# Altium PCB AeroBoard.PcbDoc
Units mil, origin at the board's own origin, x right, y up, seen from the top; angles counter-clockwise.
Board outline 6000 x 4000 mil, 2 copper layers (Top Layer, Bottom Layer); 14 components, 10 nets, 45 pads, 0 vias.
Unrouted connection lines stored in the file: 25.
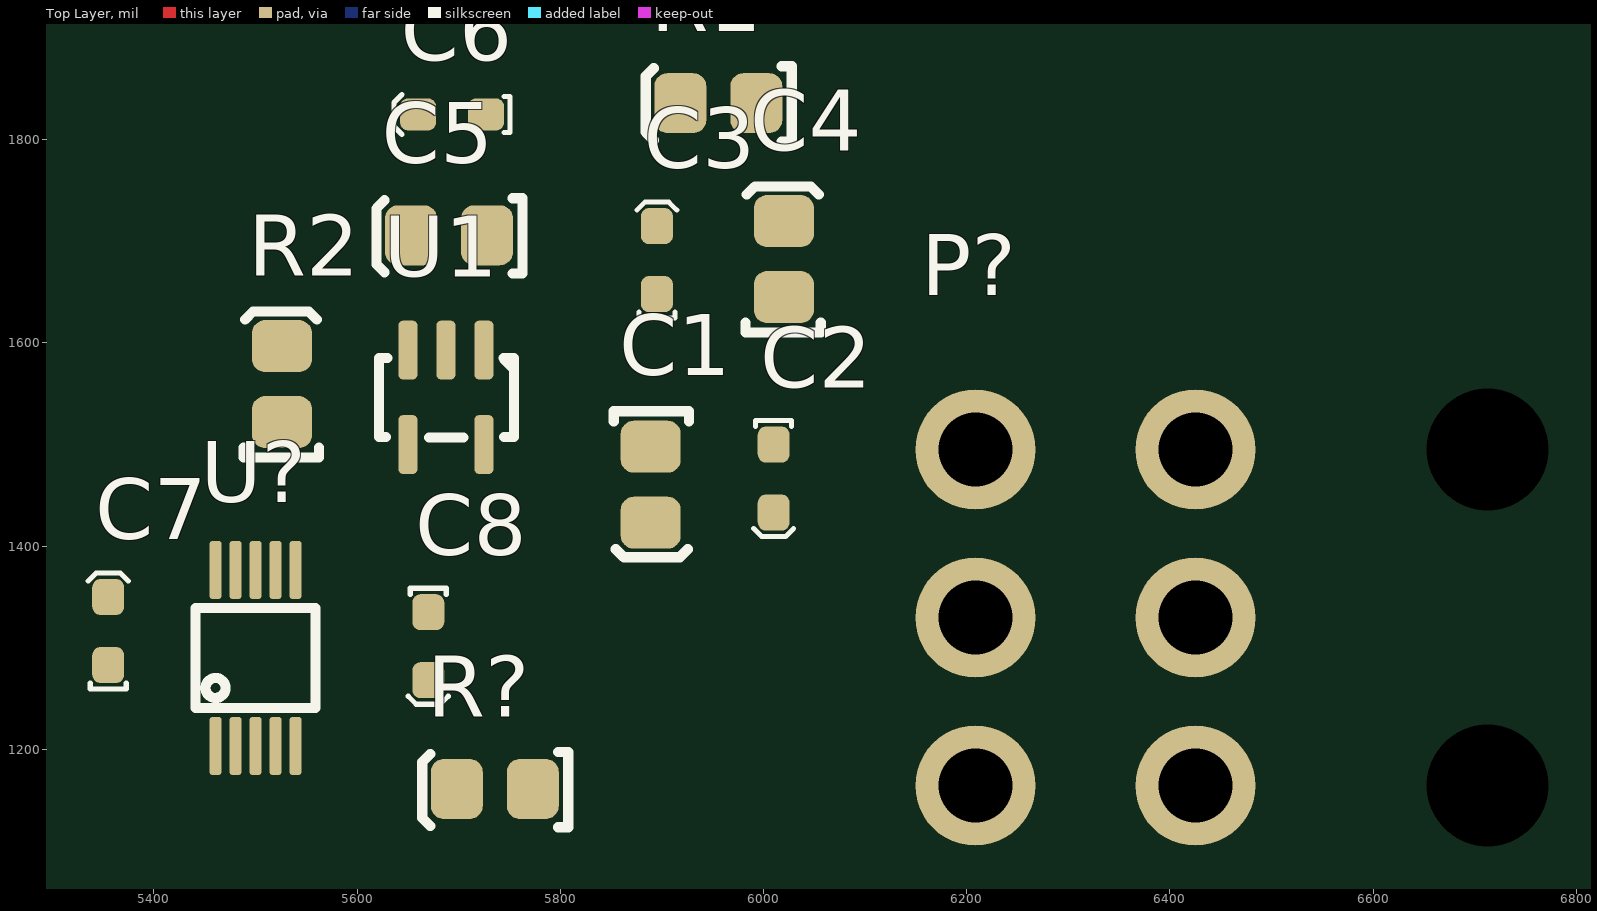
[diagram p0: Top Layer view]
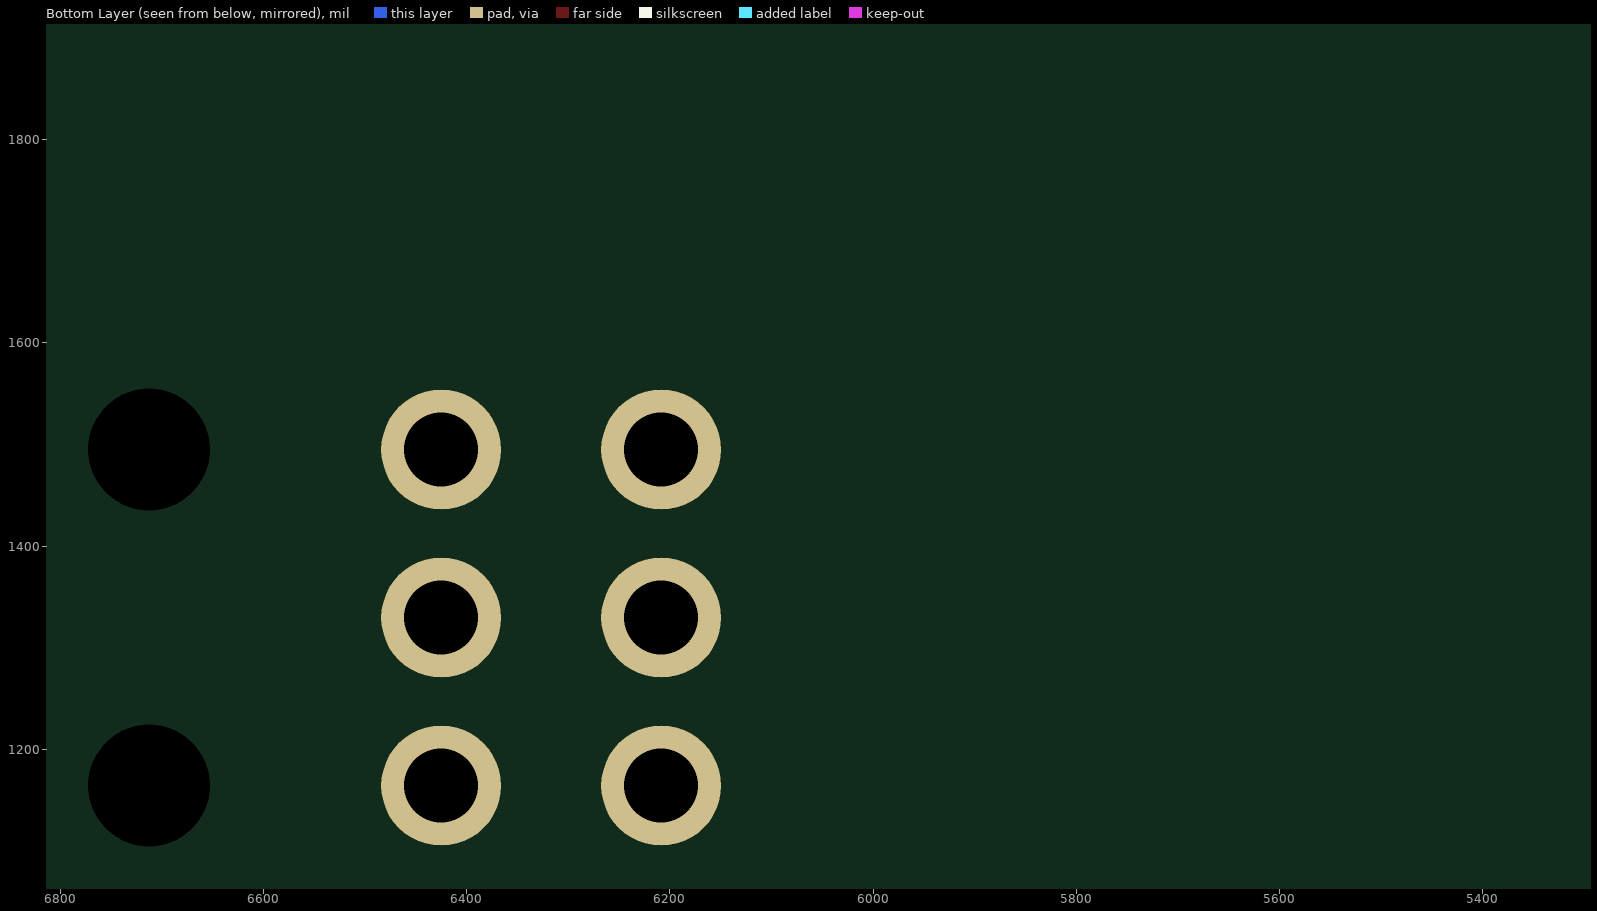
[diagram p1: Bottom Layer view, seen from below]

## Layer stack, top to bottom
Top Solder: solder mask 0.4, Solder Resist, Dk 3.5
Top Layer: signal copper 1.4
Dielectric 1: dielectric 12.6, FR-4, Dk 4.8
Bottom Layer: signal copper 1.4
Bottom Solder: solder mask 0.4, Solder Resist, Dk 3.5

## Board outline
1000,1000 7000,1000 7000,5000 1000,5000

## Design rules (kind name [scope] priority, off if disabled: settings)
Clearance [All] p1: gap=10 ignorepadtopadclearanceinfootprint=FALSE
PolygonConnect [All] p1: connectstyle=Relief reliefconductorwidth=10 reliefentries=4 polygonreliefangle="90 Angle" airgapwidth=10
RoutingVias [All] p1: holewidth=28 width=50 viastyle="Through Hole" minholewidth=28 minwidth=50 maxholewidth=28 maxwidth=50
SolderMaskExpansion [All] p1: expansion=4 istentingtop=FALSE
Width [All] p1: maxlimit=10 minlimit=10 preferedwidth=10
30 further rules are at their usual default settings.

## Components (designator, comment, footprint, x,y, rotation, side; value= is the part's Value field where it differs from the comment)
C1 "1µF" 0805 5890,1460 r270 top
C2 "10nF" 0603 6010,1500 r270 top
C3 "100nF" 0603 5895,1648.07 r90 top
C4 "1µF" 0805 6018.97,1683.07 r90 top
C5 "1µF" 0805 5690,1705 r180 top
C6 "100nF" 0603 5726.93,1825 r180 top
C7 "100nF" 0603 5355,1283.07 r90 top
C8 "100nF" 0603 5670,1335 r270 top
P? "39300060" 39300060 6425,1495 r90 top
R1 "1.2k" 0805 5955,1835 r180 top
R2 "1.2k" 0805 5525,1560 r90 top
R? "1k" 0805 5735,1160 r180 top
U1 "TLV70033-Q1" "TI SOT-23-5" 5724.8,1593 r180 top
U? "ADS1115" "TI 10-VSSOP" 5500,1290 r90 top

## Footprints (in the part's own frame and the unit in brackets; to place one, negate y for a bottom-side part, rotate by r counter-clockwise, add the part's x,y. Pads: shape width x height; smd on the part's side, far side on the other; paste and mask are expansions set on the pad)
0603 [mm]
  rrect50% 0.9x0.8 smd: 1(0,0) 2(1.7,0)
  silkscreen extent -0.6,-0.5 2.3,0.5, body extent 0.05,-0.42 1.65,0.43, height 0.6
0805 [mil]
  rrect50% 51.18x59.06 smd: 1(-37.87,-1.03) 2(36.93,-1.03)
  silkscreen extent -73,-37 71,37, body extent -39,-26 39,26, height 29
39300060 [mm]
  round 3 hole 1.85: 1(0,0) 2(0,5.5) 3(-4.2,0) 4(-4.2,5.5) 5(-8.4,0) 6(-8.4,5.5)
  round 1.524 hole 3.05: ""(-8.4,-7.3) ""(0,-7.3)
  body extent -11.1,-13.87 3.1,6.07, height 11.4
"TI 10-VSSOP" [mm]
  rrect50% 1.45x0.3 smd mask+0.05: 1(-2.2,1) 2(-2.2,0.5) 3(-2.2,0) 4(-2.2,-0.5) 5(-2.2,-1) 6(2.2,-1) 7(2.2,-0.5) 8(2.2,0) 9(2.2,0.5) 10(2.2,1)
  silkscreen extent -1.25,-1.5 1.25,1.5, body extent -2.45,-1.5 2.45,1.5, height 1.12
"TI SOT-23-5" [mil]
  rrect50% 19x58 smd: 1(0,0) 2(37.4,0) 3(74.8,0) 4(74.8,93) 5(0,93)
  silkscreen extent -30,8 103,86, body extent -23,-12 97,106, height 57

## Part data
C1 C4 C5: library part GCM21BR71H105KA03L, Digikey Part Number=490-10675-1-ND, Manufacturer=muRata, Rated Voltage=50V, Temperature Rating=X7R, Tolerance=±10%, Material=MLCC, Part Number=GCM21BR71H105KA03L
C2: library part GCM188L81H103KA03D, Digikey Part Number=490-GCM188L81H103KA03DCT-ND, Manufacturer=muRata, Rated Voltage=50V, Temperature Rating=X8L, Tolerance=±10%, Material=MLCC, Part Number=GCM188L81H103KA03D
C3 C6 C7 C8: library part GCM188L81H104KA57D, Digikey Part Number=490-6049-1-ND, Manufacturer=muRata, Rated Voltage=50V, Temperature Rating=X8L, Tolerance=±10%, Material=MLCC, Part Number=GCM188L81H104KA57D
P?: Digikey Part Number=WM21353-ND, Angle=90, Contact=Tin, Flange=No, Part Number=39300060, Pitch=4.2mm, Positions=6, Row Spacing=5.5mm
R1 R2: library part RC0805FR071K2L, Digikey Part Number=311-1.20KCRCT-ND, Manufacturer=YAGEO, Rated Power=0.125W, Tolerance=0.01, Material=FR-07, Part Number=RC0805FR071K2L
R?: library part RC0805FR071KL, Digikey Part Number=311-1.00KCRCT-ND, Manufacturer=YAGEO, Rated Power=0.125W, Tolerance=0.01, Material=FR-07, Part Number=RC0805FR071KL
U1: "IC REG LINEAR 3.3V 200MA SOT23-5", Digikey Part Number=296-27780-1-ND, Input Voltage="2 to 5.5 V", Manufacturer="Texas Instruments", Output Current="0.2 A", Output Voltage="3.3 V", Part Number=TLV70033-Q1
U?: "16 Bit Analog to Digital Converter 2, 4 Input 1 Sigma-Delta 10-VSSOP", Digikey Part Number=296-38849-1-ND, Manufacturer="Texas Instruments", Complex IC=1, Part Number=ADS1115

## Nets (pads, with @x,y where several pads share a name; then routed paths per layer and width w, separated by ;. In a path a pad name is that pad's centre, name@x,y a point inside that pad or via, vN(x,y) a via of type N, cw(c..) or ccw(c..) an arc to the next point about the centre after c; other vN are vias at no path point)
"   +5": C7.2 U?.8
+5: C5.1 C6.1 R1.2 R2.2 U1.1 U1.3
GND: C1.2 C2.2 C7.1 C8.1 P?.2 U?.3
NetC1_1: C1.1 C2.1 C3.1 C4.1 U1.5
NetC3_2: C3.2 C4.2 C5.2 C6.2 U1.2
NetC8_2: C8.2 R?.1
NetR?_2: R?.2 U?.4
PWR: P?.1 R1.1
SCL: P?.4 U?.10
SDA: P?.3 R2.1 U?.9
pads on no net: P?. P?.5 P?.6 U1.4 U?.1 U?.2 U?.5 U?.6 U?.7